# Altium PCB MaPan.PcbDoc
Units mil, origin at the board's own origin, x right, y up, seen from the top; angles counter-clockwise.
Board outline 1125.98 x 1125.98 mil, 2 copper layers (Top Layer, Bottom Layer); 6 components, 7 nets, 32 pads, 6 vias.
Unrouted connection lines stored in the file: 6.
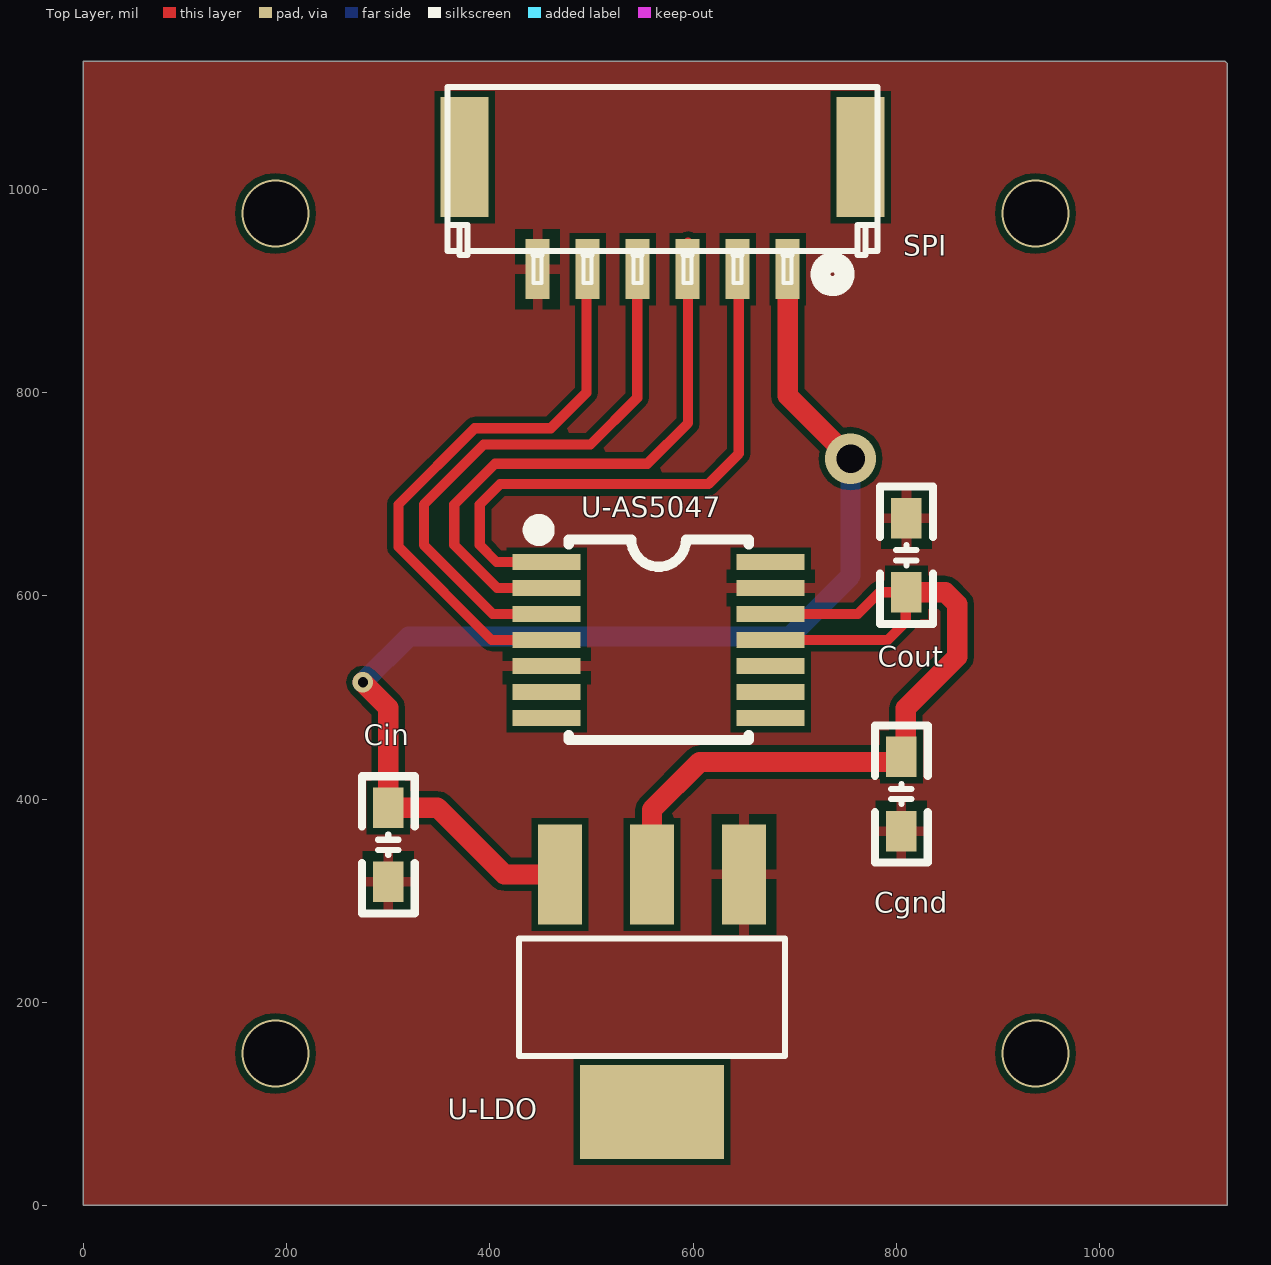
[diagram p0: Top Layer view]
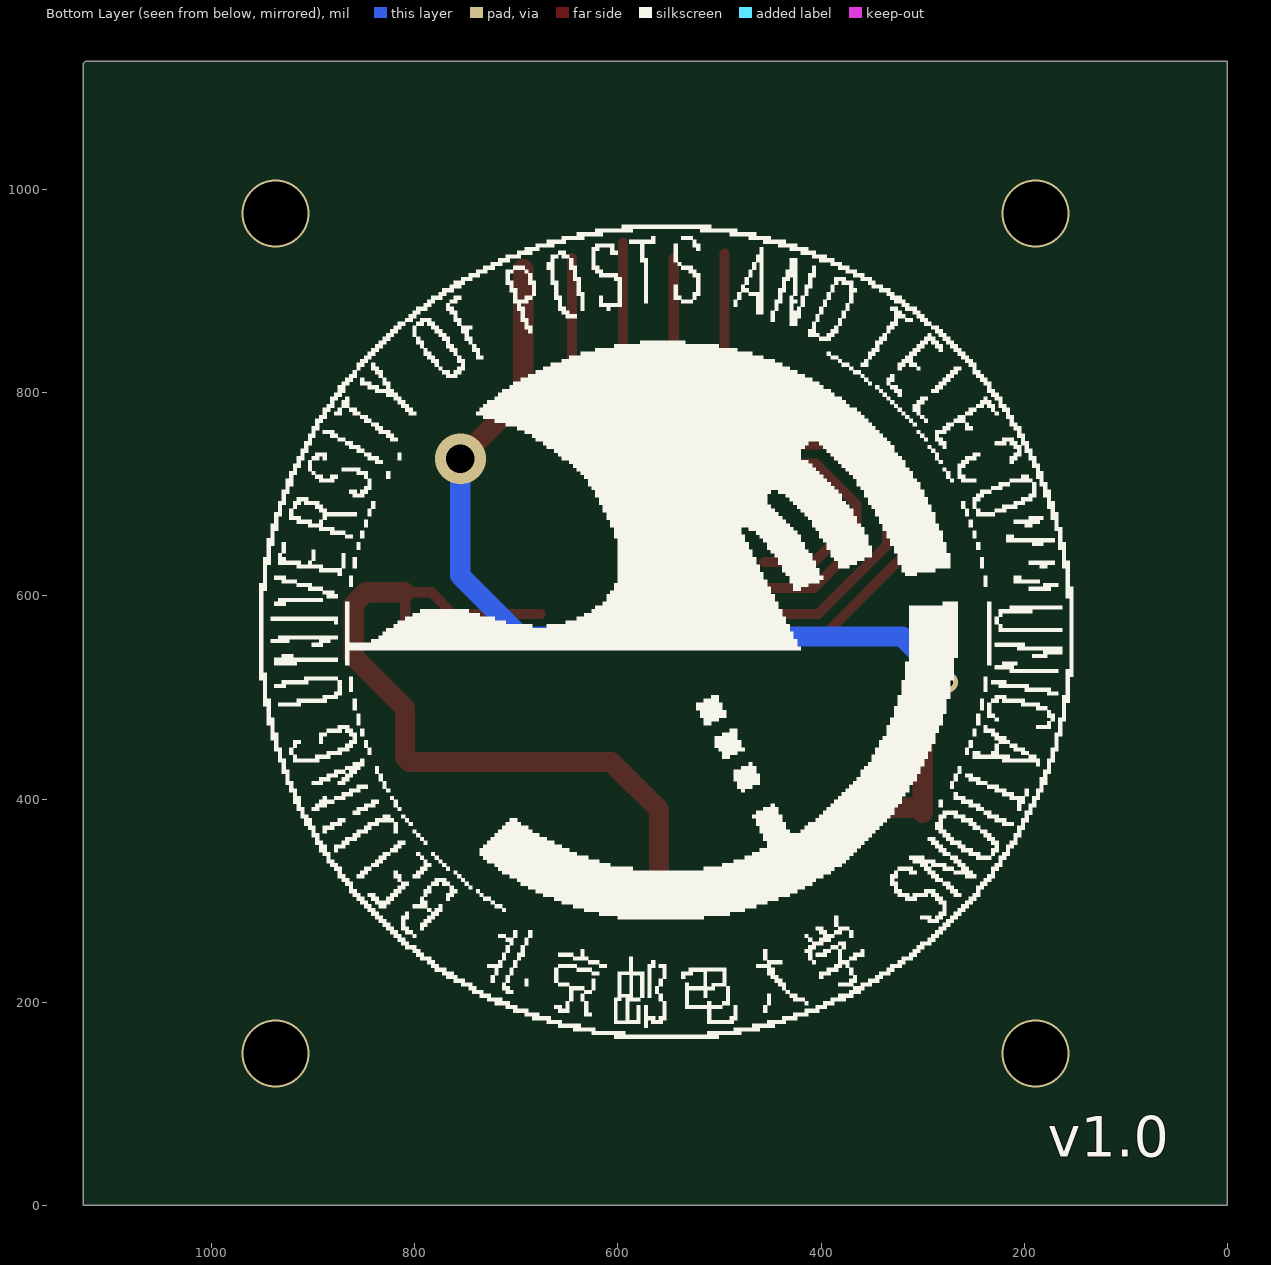
[diagram p1: Bottom Layer view, seen from below]
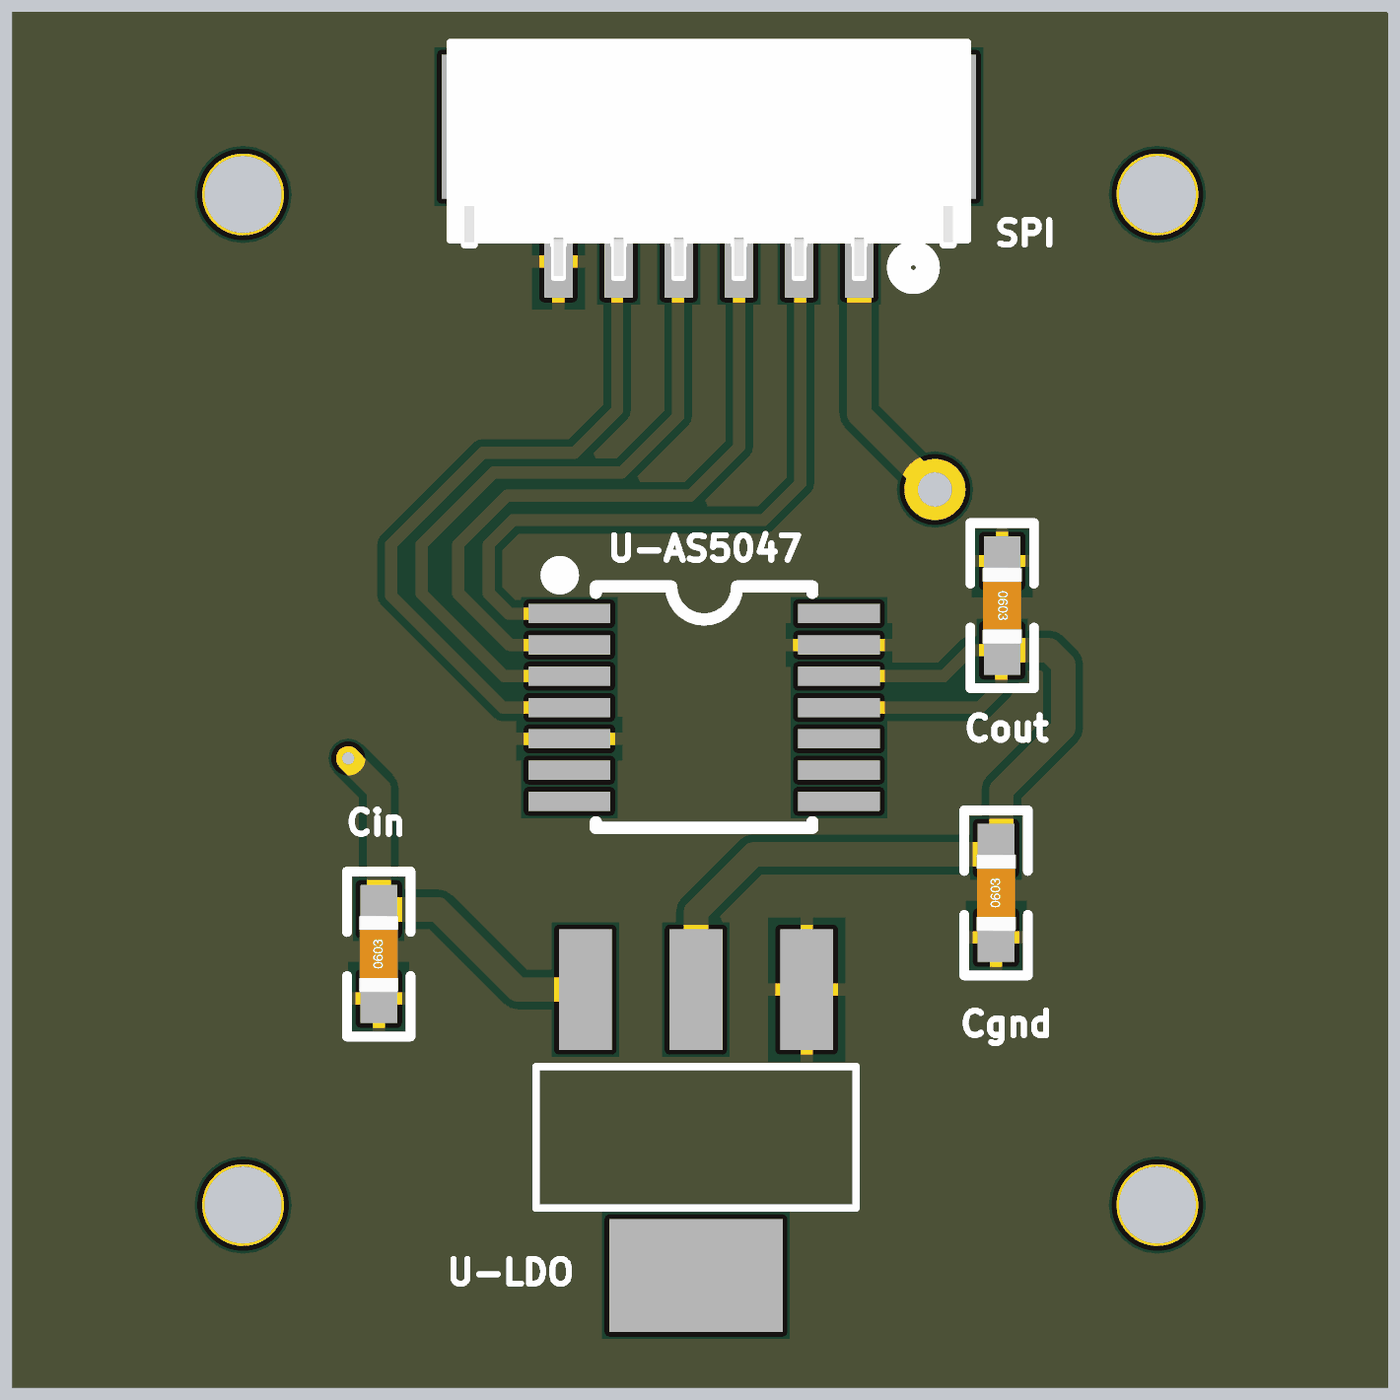
[diagram p2: 3D render of the assembled board from above, using the file's embedded part models]

## Layer stack, top to bottom
Top Solder: solder mask 0.4, Solder Resist, Dk 3.5
Top Layer: signal copper 1.4
Dielectric 1: dielectric 12.6, FR-4, Dk 4.8
Bottom Layer: signal copper 1.4
Bottom Solder: solder mask 0.4, Solder Resist, Dk 3.5

## Board outline
0,0 1125.98,0 1125.98,1124.02 1124.02,1125.98 0,1125.98

## Design rules (kind name [scope] priority, off if disabled: settings)
Clearance [All] p1: gap=6 ignorepadtopadclearanceinfootprint=TRUE
PolygonConnect [All] p1: connectstyle=Relief reliefconductorwidth=10 reliefentries=4 polygonreliefangle="90 Angle" airgapwidth=10
RoutingVias [All] p1: holewidth=28 width=50 viastyle="Through Hole" minholewidth=28 minwidth=50 maxholewidth=28 maxwidth=50
SolderMaskExpansion [All] p1: expansion=4 istentingtop=FALSE
Width [All] p1: maxlimit=100 minlimit=10 preferedwidth=10
30 further rules are at their usual default settings.

## Components (designator, comment, footprint, x,y, rotation, side; value= is the part's Value field where it differs from the comment)
Cgnd "100nF" "C 0603_M" 805,405 r90 top
Cin "100nF" "C 0603_M" 300,355 r90 top
Cout "10uF" "C 0603_M" 810,640 r270 top
SPI "HDR-1X6" GH1.25-WS-6P 570,1020 r0 top (schematic designator JP1)
U-AS5047 "AS5047P-ATSM COPY" TSSOP-14_L5.0-W4.4-P0.65-LS6.4-BL 562.99,562.99 r270 top
U-LDO "LD1117SC-R" SOT-223-3_L6.5-W3.4-P2.30-LS7.0-BR 505,155 r90 top

## Footprints (in the part's own frame and the unit in brackets; to place one, negate y for a bottom-side part, rotate by r counter-clockwise, add the part's x,y. Pads: shape width x height; smd on the part's side, far side on the other; paste and mask are expansions set on the pad)
"C 0603_M" [mil] "无极性贴片电容 https://item.taobao.com/item.htm?ft=t&id=613637044352"
  rect 40x30 smd: 1(-36.5,0) 2(36.5,0)
  silkscreen extent -68,-26 68,26, body extent -31,-16 31,16, height 32
GH1.25-WS-6P [mm] "A1257WR-S-6P"
  rect 1.2x3 smd: 0(-4.95,0.3) 0(4.95,0.3)
  rect 0.6x1.5 smd: 1(3.125,-2.5) 2(1.875,-2.5) 3(0.625,-2.5) 4(-0.625,-2.5) 5(-1.875,-2.5) 6(-3.125,-2.5)
  silkscreen extent -5.38,-2.93 5.37,2.05, body extent -5.38,-2.8 5.37,2.1, height 4.4
SOT-223-3_L6.5-W3.4-P2.30-LS7.0-BR [mm]
  rect 2.5x1.1 smd: 1(4.34,-3.684) 2(4.34,-1.384) 3(4.34,0.916)
  rect 2.34x3.6 smd: 4(-1.6,-1.384)
  silkscreen extent -0.2,-4.71 2.74,1.94
TSSOP-14_L5.0-W4.4-P0.65-LS6.4-BL [mm]
  rect 0.4x1.7 smd: 1(-1.788,-2.719) 2(-1.138,-2.719) 3(-0.488,-2.719) 4(0.162,-2.719) 5(0.812,-2.719) 6(1.462,-2.719) 7(2.112,-2.719) 8(2.111,2.881) 9(1.461,2.881) 10(0.811,2.881) 11(0.161,2.881) 12(-0.489,2.881) 13(-1.139,2.881) 14(-1.789,2.881)
  silkscreen extent -2.79,-3.12 2.66,2.33

## Part data
Cgnd Cin Cout: library part C, "贴片电容", BOM名称=贴片电容, 下单链接=https://item.taobao.com/item.htm?ft=t&id=613637044352, 淘宝ID=小糖豆的小窝窝
SPI: library part "Header 6", "6P接插件", BOM名称=6P接插件, 下单链接=https://item.taobao.com/item.htm?ft=t&id=613637044352, 淘宝ID=小糖豆的小窝窝

## Via types
v1: diameter 66.93, hole 62.99, Top Layer to Bottom Layer, 4 vias
v2: diameter 50, hole 28, Top Layer to Bottom Layer, 1 vias
v3: diameter 20, hole 10, Top Layer to Bottom Layer, 1 vias

## Nets (pads, with @x,y where several pads share a name; then routed paths per layer and width w, separated by ;. In a path a pad name is that pad's centre, name@x,y a point inside that pad or via, vN(x,y) a via of type N, cw(c..) or ccw(c..) an arc to the next point about the centre after c; other vN are vias at no path point)
3V3: Cgnd.2 Cout.2 U-AS5047.11 U-AS5047.12 U-LDO.2 | length 868.6
  Top Layer w10: U-AS5047.11 791.64,556.64 809.36,574.36 809.36,597.86 Cout.2@810,598.5 ; U-AS5047.12 762.23,582.23 783.5,603.5 Cout.2
  Top Layer w20: U-LDO.2 559.5,389.5 606.5,436.5 805,436.5 809.46,440.96 809.46,489.46 860,540 860,591.78 848.28,603.5 Cout.2
5V: Cin.2 SPI.1 U-LDO.3 | length 1185.7
  Top Layer w20: v3(275,515) 300,490 Cin.2@300,386.5 ; Cin.2 348.5,391.5 414.15,325.85 U-LDO.3 ; SPI.1 693.03,796.97 v2(755,735)
  Bottom Layer w20: v3(275,515) 320,560 695,560 755,620 v2(755,735)
CLK1: SPI.3 U-AS5047.2 | length 589.2
  Top Layer w10: U-AS5047.2 407.19,607.81 365,650 365,690 405,730 555,730 595,770 SPI.3@595,947.65
CSNM1: SPI.2 U-AS5047.1 | length 580.9
  Top Layer w10: U-AS5047.1 406.6,633.4 390,650 390,690 410,710 615,710 645,740 SPI.2@645,932.43
GND: Cgnd.1 Cin.1 Cout.1 SPI.6 U-AS5047.5 U-AS5047.13 U-LDO.1
MISO1: SPI.4 U-AS5047.3 | length 579.5
  Top Layer w10: U-AS5047.3 402.78,582.22 335,650 335,690 394,749 499,749 545,795 SPI.4@545,931.96
MOSI1: SPI.5 U-AS5047.4 | length 593.3
  Top Layer w10: U-AS5047.4 401.63,556.63 310,648.26 310,690 385,765 460,765 495,800 SPI.5@495,937.14
pads on no net: SPI.0 U-AS5047.6 U-AS5047.7 U-AS5047.8 U-AS5047.9 U-AS5047.10 U-AS5047.14 U-LDO.4
copper on no net:
  other v1: 188.98,149.61 937.01,149.61 188.98,976.38 937.01,976.38

## Polygon pours and split planes (outlines as drawn)
GND on Top Layer "GND_L01_P000" (solid, pour order 0): 0,0 1125.98,0 1125.98,1124.02 1124.02,1125.98 0,1125.98

## Silkscreen, mask and mechanical layers (free items; w line width, h text height)
Bottom Overlay:
  drawing of 191 lines, arcs and shapes, not listed
  text "v1.0" at 177,48 h40
Mechanical 1:
  the board outline again, w10